# Altium PCB Car_2.0.PcbDoc
Units mm, origin at the board's own origin, x right, y up, seen from the top; angles counter-clockwise.
Board outline 70 x 82.5 mm, 2 copper layers (Top Layer, Bottom Layer); 38 components, 43 nets, 209 pads, 110 vias.
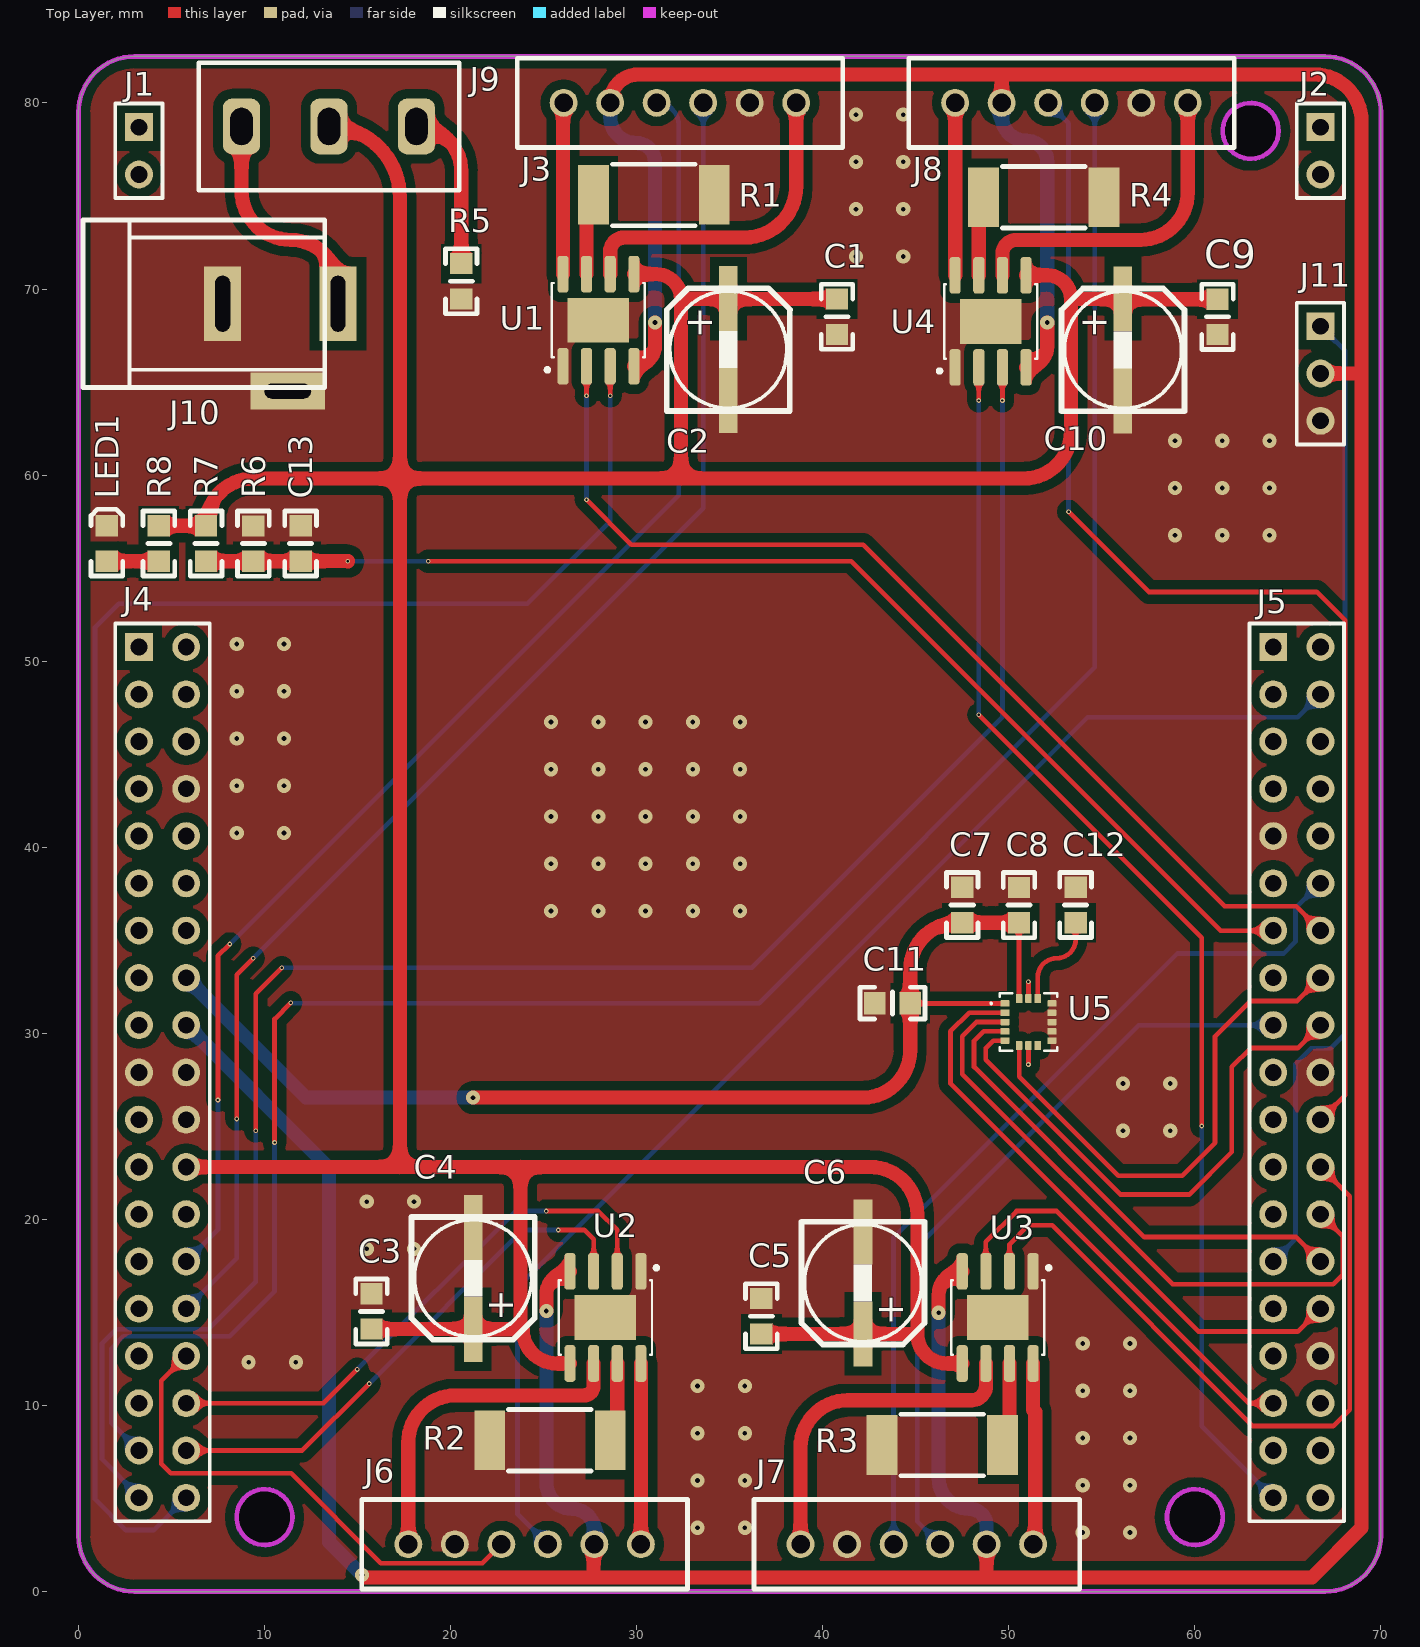
[diagram p0: Top Layer view]
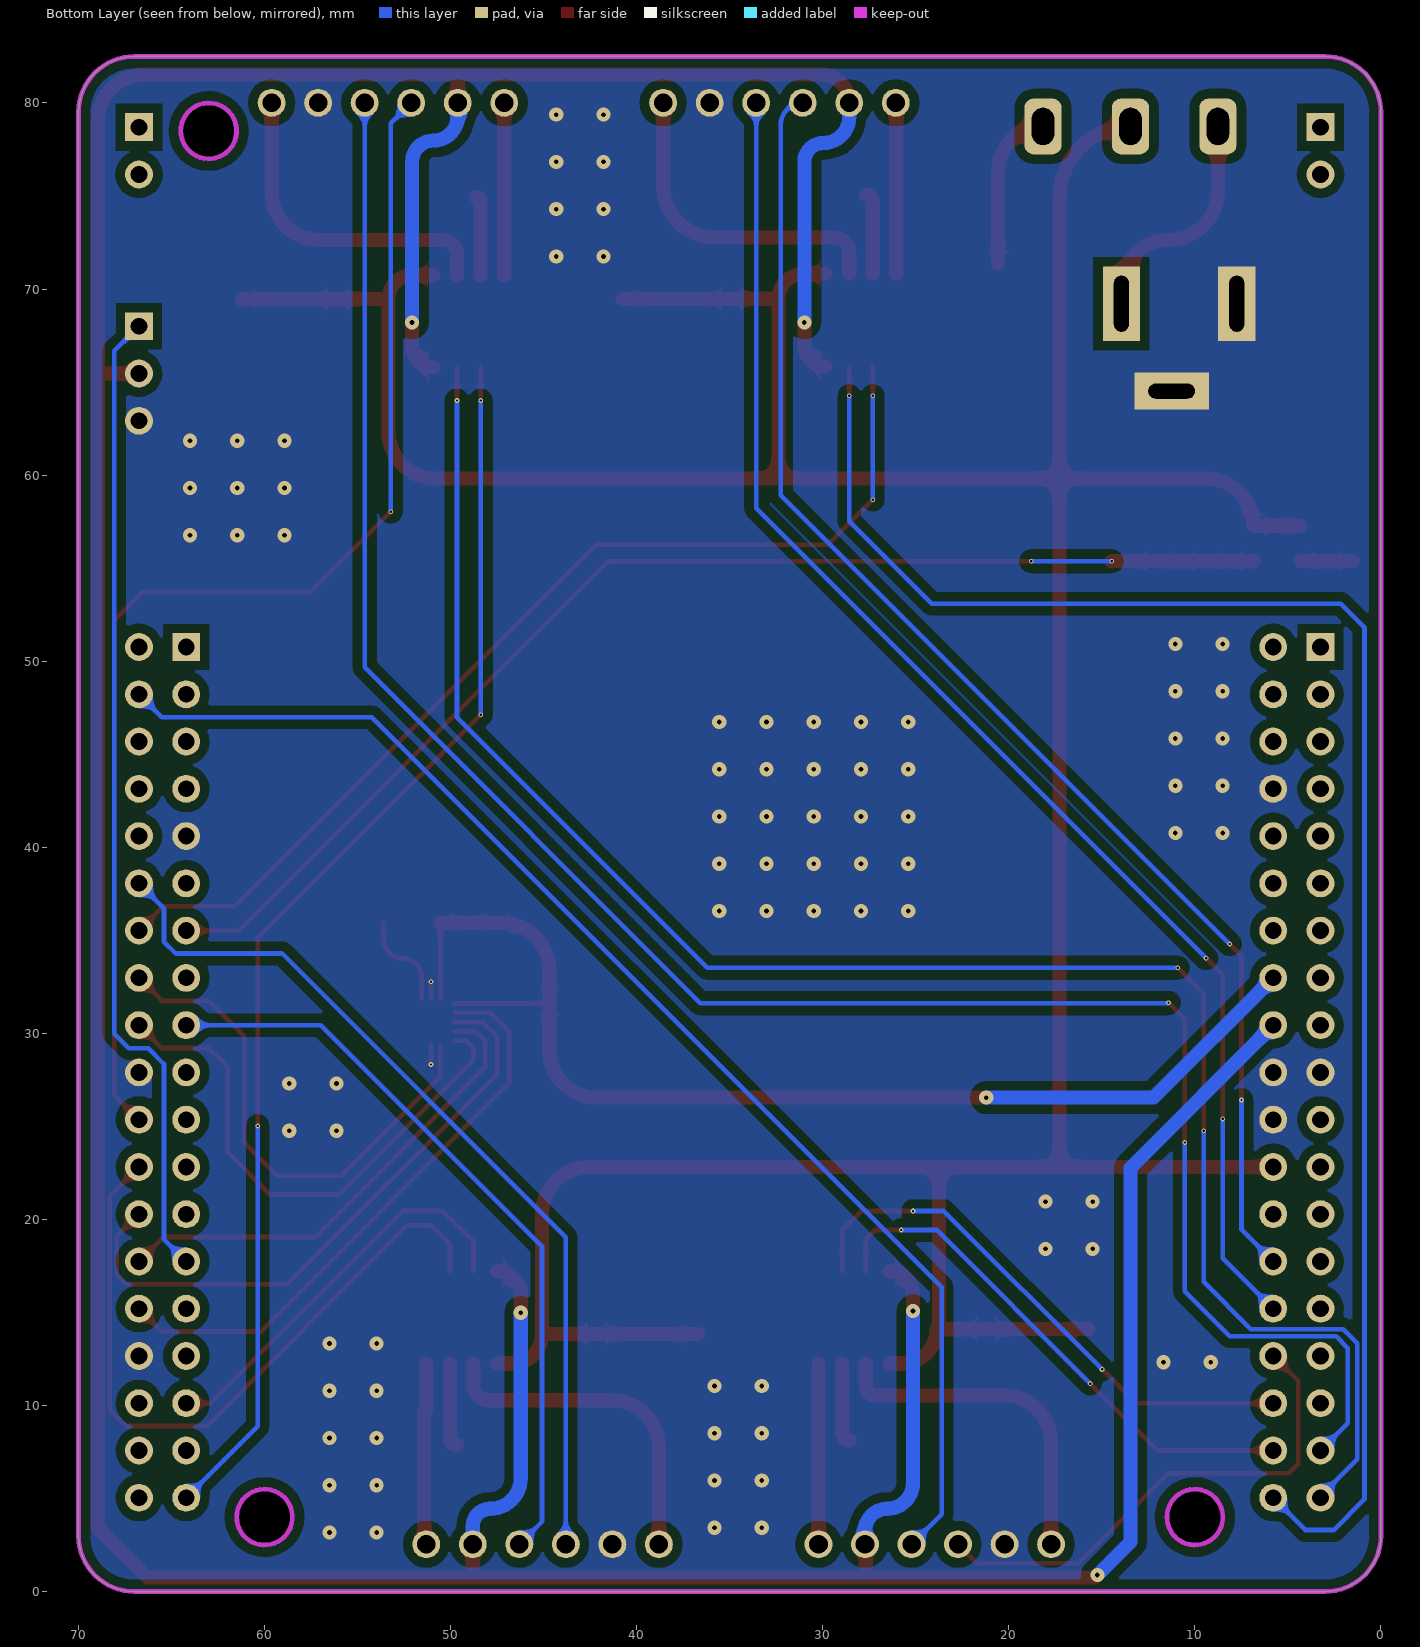
[diagram p1: Bottom Layer view, seen from below]

## Layer stack, top to bottom
Top Solder: solder mask 0.0102, Solder Resist, Dk 3.5
Top Layer: signal copper 0.0356
Dielectric 1: dielectric 0.32, FR-4, Dk 4.8
Bottom Layer: signal copper 0.0356
Bottom Solder: solder mask 0.0102, Solder Resist, Dk 3.5

## Board outline
0,3 0,79.5 cw(c3,79.5) 3,82.5 67,82.5 cw(c67,79.5) 70,79.5 70,3 cw(c67,3) 67,0 3,0 cw(c3,3)
cut-out: 61.5,78.5 ccw(c63,78.5) 63,77 ccw(c63,78.5) 64.5,78.5 ccw(c63,78.5) 63,80 ccw(c63,78.5)
cut-out: 58.5,4 ccw(c60,4) 60,2.5 ccw(c60,4) 61.5,4 ccw(c60,4) 60,5.5 ccw(c60,4)
cut-out: 8.5,4 ccw(c10,4) 10,2.5 ccw(c10,4) 11.5,4 ccw(c10,4) 10,5.5 ccw(c10,4)

## Design rules (kind name [scope] priority, off if disabled: settings)
Clearance [All] p1: gap=0.508 ignorepadtopadclearanceinfootprint=FALSE except(0: Arc-Hole Track-Hole SMDPad-Hole THPad-Hole Via-Hole Fill-Hole Poly-Hole Region-Hole Text-Hole; 0.051: Arc-Arc Arc-Track Arc-SMDPad Arc-THPad Arc-Via Arc-Text Track-Track Track-SMDPad Track-THPad Track-Via Track-Text SMDPad-SMDPad SMDPad-THPad SMDPad-Via SMDPad-Text THPad-THPad THPad-Via THPad-Text Via-Text Text-Text; 0.254: Via-Via)
DiffPairsRouting [All] p1: maxlimit=0.254 minlimit=0.127 mostfreqgap=0.254 toplayer_minwidth=0.254 toplayer_maxwidth=1.016 toplayer_prefwidth=0.508 bottomlayer_minwidth=0.254 bottomlayer_maxwidth=1.016 bottomlayer_prefwidth=0.508 maxuncoupledlength=12.7
HoleToHoleClearance [All] p1: gap=0.076 allowstackedmicrovias=TRUE
MinimumSolderMaskSliver [All] p1: minsoldermaskwidth=0.076
PlaneClearance [All] p1: clearance=0.076
PlaneConnect [All] p1: planeconnectstyle=Direct reliefexpansion=0.508 reliefentries=4 reliefconductorwidth=0.254 reliefairgap=0.254
PolygonConnect [All] p1: connectstyle=Direct reliefconductorwidth=0.254 reliefentries=4 polygonreliefangle="90 Angle" airgapwidth=0.254
RoutingVias [All] p1: holewidth=0.508 width=1.27 viastyle="Through Hole" minholewidth=0.508 minwidth=1.27 maxholewidth=1.016 maxwidth=2.54
SilkToSilkClearance [All] p1: silktosilkclearance=0
SilkToSolderMaskClearance [IsPad] p1: minsilkscreentomaskgap=0 clearancetoexposedcopper=TRUE
SolderMaskExpansion [All] p1: expansion=0.102 istentingtop=FALSE
Width [All] p1: maxlimit=1.016 minlimit=0.127 preferedwidth=0.254 minimp=50.000000 maximp=50.000000 favimp=50.000000
23 further rules are at their usual default settings.

## Components (designator, comment, footprint, x,y, rotation, side; value= is the part's Value field where it differs from the comment)
C1 "0.22u" C_0805 40.767,67.564 r90 top
C2 "C-100uF" SMD-EC-F6.3 34.925,69.483 r270 top
C3 "0.22u" C_0805 15.748,16.002 r270 top
C4 "C-100uF" SMD-EC-F6.3 21.209,14.097 r90 top
C5 "0.22u" C_0805 36.703,15.743 r270 top
C6 "C-100uF" SMD-EC-F6.3 42.164,13.843 r90 top
C7 "0.1u" C_0805 47.498,37.846 r270 top
C8 "2.2u" C_0805 50.546,37.841 r270 top
C9 "0.22u" C_0805 61.214,67.555 r90 top
C10 "C-100uF" SMD-EC-F6.3 56.134,69.469 r270 top
C11 "10n" C_0805 42.799,31.623 r0 top
C12 "0.1u" C_0805 53.594,37.846 r270 top
C13 "200n" C_0805 11.938,57.277 r270 top
J1 "kong-2" HDR1X2 3.25,78.7 r270 top
J2 "kong-2" HDR1X2 66.75,78.7 r270 top
J3 "motor" XH2.54-6P 38.575,80.01 r180 top
J4 "STM32F474_1" HDR2*19 3.25,50.76 r0 top
J5 "STM32F474_2" HDR2*19 64.21,50.76 r0 top
J6 "motor" XH2.54-6P 17.726,2.54 r0 top
J7 "motor" XH2.54-6P 38.808,2.54 r0 top
J8 "motor" XH2.54-6P 59.617,80.01 r180 top
J9 "KEY" SS-12D10 13.462,78.74 r0 top
J10 "DC005" DC-005 7.747,69.215 r180 top
J11 "H1*3" HDR1X3 66.75,68 r270 top
LED1 "LED_0805" LED0805 1.524,55.377 r90 top
R1 "0.25" R_2512 34.163,75.057 r180 top
R2 "0.25" R_2512 22.098,8.128 r0 top
R3 "0.25" R_2512 43.18,7.874 r0 top
R4 "0.25" R_2512 55.121,74.93 r180 top
R5 "100" R_0805 20.574,69.469 r90 top
R6 "10k" R_0805 9.398,57.272 r270 top
R7 "100k" R_0805 6.858,55.377 r90 top
R8 "10k" R_0805 4.318,55.377 r90 top
U1 "A4950ELJTR-T" SOIC-9N 27.943,68.326 r90 top
U2 "A4950ELJTR-T" SOIC-9N 28.321,14.732 r270 top
U3 "A4950ELJTR-T" SOIC-9N 49.403,14.732 r270 top
U4 "A4950ELJTR-T" SOIC-9N 49.022,68.264 r90 top
U5 "ICM-20602" PQFN-16N 51.054,30.607 r0 top

## Footprints (in the part's own frame and the unit in brackets; to place one, negate y for a bottom-side part, rotate by r counter-clockwise, add the part's x,y. Pads: shape width x height; smd on the part's side, far side on the other; paste and mask are expansions set on the pad)
C_0805 [mm]
  rect 1.14x1.2 smd: 1(0,0) 2(1.9,0)
  silkscreen extent -0.8,-0.85 2.7,0.85
DC-005 [mm] "5.5*2.1mm，DC30V,2.5A"
  rect 2x4 hole 0.8 slot 3 at 90 deg: 1(-6.2,0) 2(0,0)
  rect 4x2 hole 0.8 slot 2.5 at 0 deg: 3(-3.5,4.7)
  silkscreen extent -5.48,-4.5 7.5,4.5, body extent -6.55,-4.5 7.5,4.8, height 11.2
HDR1X2 [mm] "Connector; Header; 2 Position"
  rect 1.5x1.5 hole 0.9: 1(0,0)
  round 1.5 hole 0.9: 2(2.54,0)
  silkscreen extent -1.27,-1.27 3.81,1.27
HDR1X3 [mm] "Connector; Header; 3 Position"
  rect 1.5x1.5 hole 0.9: 1(0,0)
  round 1.5 hole 0.9: 2(2.54,0) 3(5.08,0)
  silkscreen extent -1.27,-1.27 6.35,1.27
HDR2*19 [mm]
  rect 1.5x1.5 hole 0.9: 1(0,0)
  round 1.5 hole 0.9: 2(2.54,0) 3(0,-2.54) 4(2.54,-2.54) 5(0,-5.08) 6(2.54,-5.08) 7(0,-7.62) 8(2.54,-7.62) 9(0,-10.16) 10(2.54,-10.16) 11(0,-12.7) 12(2.54,-12.7) 13(0,-15.24) 14(2.54,-15.24) 15(0,-17.78) 16(2.54,-17.78) 17(0,-20.32) 18(2.54,-20.32) 19(0,-22.86) 20(2.54,-22.86) 21(0,-25.4) 22(2.54,-25.4) 23(0,-27.94) 24(2.54,-27.94) 25(0,-30.48) 26(2.54,-30.48) 27(0,-33.02) 28(2.54,-33.02) 29(0,-35.56) 30(2.54,-35.56) 31(0,-38.1) 32(2.54,-38.1) 33(0,-40.64) 34(2.54,-40.64) 35(0,-43.18) 36(2.54,-43.18) 37(0,-45.72) 38(2.54,-45.72)
  silkscreen extent -1.27,-46.99 3.81,1.27
LED0805 [mm]
  rect 1.14x1.2 smd: 1(0,0) 2(1.9,0)
  silkscreen extent -0.8,-0.85 2.79,0.85
PQFN-16N [mm]
  rrect25% 0.49x0.35 smd: 1(-1.26,1) 2(-1.26,0.5) 3(-1.26,0) 4(-1.26,-0.5) 5(-1.26,-1) 9(1.26,-1) 10(1.26,-0.5) 11(1.26,0) 12(1.26,0.5) 13(1.26,1)
  rrect25% 0.35x0.49 smd: 6(-0.5,-1.26) 7(0,-1.26) 8(0.5,-1.26) 14(0.5,1.26) 15(0,1.26) 16(-0.5,1.26)
  silkscreen extent -2.05,-1.55 1.55,1.55, body extent -1.5,-1.5 1.5,1.5, height 0.78
R_0805 [mm]
  rect 1.14x1.2 smd: 1(0,0) 2(1.9,0)
  silkscreen extent -0.8,-0.85 2.7,0.85
R_2512 [mm]
  rect 1.65x3.2 smd paste+0: 1(0,0) 2(6.48,0)
  silkscreen extent 1.02,-1.65 5.46,1.65
SMD-EC-F6.3 [mm]
  rect 3.5x1 smd: 1(0,0) 2(5.475,0)
  silkscreen extent -0.56,-3.31 6.04,3.31, body extent -0.92,-3.32 6.37,3.27, height 6
SOIC-9N [mm]
  rrect54% 1.97x0.6 smd: 1(-2.475,1.905) 2(-2.475,0.635) 3(-2.475,-0.635) 4(-2.475,-1.905) 5(2.475,-1.905) 6(2.475,-0.635) 7(2.475,0.635) 8(2.475,1.905)
  rect 2.41x3.3 smd paste-3: 9(0,0)
  silkscreen extent -2.77,-2.5 2,2.84
SS-12D10 [mm] "脚距3mm"
  rrect50% 2x3 hole 2 slot 1.2 at 0 deg: 1(-4.7,0) 2(0,0) 3(4.7,0)
  silkscreen extent -7,-3.43 7,3.43, body extent -7,-3.1 7,3.1, height 9.65
XH2.54-6P [mm]
  round 1.5 hole 1: 1(0,0) 2(2.5,0) 3(5,0) 4(7.5,0) 5(10,0) 6(12.5,0)
  silkscreen extent -2.5,-2.4 15,2.4

## Part data
C1 C3 C5 C7 C8 C9 C11 C12 C13: library part C_0805
R1 R2 R3 R4: library part R-2512
R5 R6 R7 R8: library part R_0805
U1 U2 U3 U4: Package="SOIC-8 RS Components", Digi-Key_Part_Number=620-1400-1-ND, Digi-Key_Purchase_URL=https://www.digikey.com/product-detail/en/allegro-microsystems/A4950ELJTR-T/620-1400-1-ND/2626340?utm_source=snapeda&utm_medium=aggregator&utm_campaign=symbol, MF="RS Components", MP=A4950ELJTR-T, SnapEDA_Link=https://www.snapeda.com/parts/A4950ELJTR-T/RS%20Components/view-part/943919/?ref=snap
U5: "Accelerometer, Gyroscope, Temperature, 6 Axis Sensor IÂ²C, SPI Output", Package="PQFN-16 TDK-InvenSense", Availability=Good, Check_prices=https://www.snapeda.com/parts/ICM-20602/TDK%20InvenSense/view-part/474472/?ref=eda, MF="TDK InvenSense", MP=ICM-20602, Price=None, Purchase-URL=https://pricing.snapeda.com/search/part/ICM-20602/?ref=eda, SnapEDA_Link=https://www.snapeda.com/parts/ICM-20602/TDK%20InvenSense/view-part/474472/?ref=snap

## Via types
v1: diameter 0.762, hole 0.254, Top Layer to Bottom Layer, 86 vias
v2: diameter 0.254, hole 0.127, Top Layer to Bottom Layer, 24 vias

## Nets (pads, with @x,y where several pads share a name; then routed paths per layer and width w, separated by ;. In a path a pad name is that pad's centre, name@x,y a point inside that pad or via, vN(x,y) a via of type N, cw(c..) or ccw(c..) an arc to the next point about the centre after c; other vN are vias at no path point)
3.3V: C7.2 C8.2 C11.2 J4.16 U5.1 U5.16 | length 63.8
  Top Layer w0.254: C11.2@44.699,31.607 U5.1 ; C8.2 50.546,31.867 U5.16
  Top Layer w0.762: v1(21.209,26.543) 42.159,26.543 ccw(c42.159,29.083) 44.699,29.083 44.699,31.607 C11.2 44.699,33.406 cw(c47.239,33.406) 47.239,35.946 C7.2 47.498,35.941 C8.2
  Bottom Layer w0.762: J4.16 12.227,26.543 v1(21.209,26.543)
5V: J3.5 J4.18 J6.5 J7.5 J8.5 J11.2 U1.4 U2.4 U3.4 U4.4 | length 280
  Top Layer w0.762: v1(15.24,0.889) 15.367,0.762 48.808,0.762 ; v1(25.146,15.073) 25.146,15.937 cw(c26.416,15.937) U2.4 ; 27.686,0.929 27.686,2.5 J6.5 ; J3.5 cw(c30.099,80.01) 30.099,81.534 49.617,81.534 49.669,81.534 ; U1.4 ccw(c29.848,66.991) 30.988,66.991 v1(30.988,68.199) ; v1(46.228,14.986) 46.228,15.937 cw(c47.498,15.937) U3.4 ; J7.5 48.808,0.762 ; J8.5 49.617,81.482 cw(c49.669,81.482) 49.669,81.534 ; U4.4 ccw(c50.927,66.932) 52.07,66.932 v1(52.07,68.199) ; J11.2 68.906,65.46 cw(c68.906,65.405) 68.961,65.405 ; 48.808,0.762 66.294,0.762 68.961,3.429 68.961,61.595 68.961,65.405 ; 49.669,81.534 66.421,81.534 cw(c66.421,78.994) 68.961,78.994 68.961,65.46 68.961,65.405
  Bottom Layer w0.762: J4.18 13.462,22.768 13.462,2.667 v1(15.24,0.889) ; v1(25.146,15.073) 25.146,5.842 ccw(c26.543,5.842) 26.543,4.445 cw(c26.543,3.262) 27.726,3.262 J6.5 ; J3.5 28.575,79.248 ccw(c29.972,79.248) 29.972,77.851 cw(c29.972,76.835) 30.988,76.835 v1(30.988,68.199) ; v1(46.228,14.986) 46.228,6.096 ccw(c47.879,6.096) 47.879,4.445 cw(c47.879,3.516) 48.808,3.516 J7.5 ; J8.5 49.617,79.288 ccw(c50.927,79.288) 50.927,77.978 cw(c50.927,76.835) 52.07,76.835 v1(52.07,68.199)
12V: C1.2 C2.1 C3.2 C4.1 C5.2 C6.1 C9.2 C10.1 J4.24 J9.2 R7.2 R8.2 U1.5 U2.5 U3.5 U4.5 | length 228.9
  Top Layer w0.762: R8.2 R7.2 cw(c9.398,57.277) 9.398,59.817 17.272,59.817 ; J4.24 17.272,22.82 ; J9.2 cw(c13.462,74.93) 17.272,74.93 17.272,59.817 ; C3.2 21.209,14.102 C4.1 23.876,14.097 ; U2.5 25.716,12.257 cw(c25.716,14.097) 23.876,14.097 ; U1.5 31.053,70.801 cw(c31.053,69.469) 32.385,69.483 ; C5.2 C6.1 45.085,13.843 ; C1.2 34.944,69.464 cw(c34.944,69.483) C2.1 32.385,69.483 ; U3.5 46.671,12.257 cw(c46.671,13.843) 45.085,13.843 ; U4.5 52.07,70.739 cw(c52.07,69.469) 53.34,69.469 ; C9.2 56.134,69.455 C10.1 53.34,69.469 ; 17.272,22.82 17.272,59.817 ; 17.272,22.82 23.749,22.82 ; 17.272,59.817 32.385,59.817 ; 23.749,22.82 42.545,22.82 cw(c42.545,20.28) 45.085,20.28 45.085,13.843 ; 23.749,22.82 23.749,14.224 ccw(c23.876,14.224) 23.876,14.097 ; 32.385,59.817 50.8,59.817 ccw(c50.8,62.357) 53.34,62.357 53.34,69.469 ; 32.385,59.817 32.385,69.483
ADC_IN3: C13.2 J5.13 R6.2 R7.1 | length 65.6
  Top Layer w0.254: v2(18.796,55.372) 41.529,55.372 61.381,35.52 J5.13
  Top Layer w0.762: R7.1 6.861,55.374 9.396,55.374 R6.2 9.4,55.374 11.935,55.374 C13.2 v2(14.473,55.377) v2@14.478,55.372
  Bottom Layer w0.254: v2(14.473,55.377) 14.478,55.372 v2(18.796,55.372)
CS: J5.18 U5.5 | length 29.3
  Top Layer w0.254: U5.5 49.165,29.607 48.768,29.21 48.768,28.575 56.007,21.336 59.69,21.336 61.976,23.622 61.976,28.194 62.992,29.21 65.52,29.21 J5.18
GND: C1.1 C2.2 C3.1 C4.2 C5.1 C6.2 C7.1 C8.1 C9.1 C10.2 C11.1 C12.1 C13.1 J3.2 J4.8 J4.19 J4.20 J4.22 J5.9 J5.20 J5.32 J6.2 J7.2 J8.2 J10.2 J10.3 J11.3 LED1.2 R1.1 R2.1 R3.1 R4.1 R5.1 R6.1 U1.1 U1.9 U2.1 U2.9 U3.1 U3.9 U4.1 U4.9 U5.7 U5.9 U5.10 U5.11 U5.12 U5.13 U5.15 | length 1.9
  Top Layer w0.254: v2(51.054,28.321) U5.7 ; U5.15 v2(51.054,32.766)
  other v1: 53.975,3.175 56.515,3.175 33.274,3.429 35.814,3.429 53.975,5.715 56.515,5.715 33.274,5.969 35.814,5.969 53.975,8.255 56.515,8.255 33.274,8.509 35.814,8.509 53.975,10.795 56.515,10.795 33.274,11.049 35.814,11.049 9.144,12.319 11.684,12.319 53.975,13.335 56.515,13.335 15.494,18.415 18.034,18.415 15.494,20.955 18.034,20.955 56.134,24.765 58.674,24.765 56.134,27.305 58.674,27.305 25.4,36.576 27.94,36.576 30.48,36.576 33.02,36.576 35.56,36.576 25.4,39.116 27.94,39.116 30.48,39.116 33.02,39.116 35.56,39.116 8.509,40.767 11.049,40.767 25.4,41.656 27.94,41.656 30.48,41.656 33.02,41.656 35.56,41.656 8.509,43.307 11.049,43.307 25.4,44.196 27.94,44.196 30.48,44.196 33.02,44.196 35.56,44.196 8.509,45.847 11.049,45.847 25.4,46.736 27.94,46.736 30.48,46.736 33.02,46.736 35.56,46.736 8.509,48.387 11.049,48.387 8.509,50.927 11.049,50.927 58.928,56.769 61.468,56.769 64.008,56.769 58.928,59.309 61.468,59.309 64.008,59.309 58.928,61.849 61.468,61.849 64.008,61.849 41.783,71.755 44.323,71.755 41.783,74.295 44.323,74.295 41.783,76.835 44.323,76.835 41.783,79.375 44.323,79.375
INT: J5.16 U5.6 | length 27.8
  Top Layer w0.254: U5.6 50.554,27.678 55.88,22.352 59.309,22.352 61.087,24.13 61.087,29.834 62.992,31.739 65.509,31.739 J5.16
MISO: J5.28 U5.4 | length 26.2
  Top Layer w0.254: U5.4 48.649,30.107 48.133,29.591 48.133,28.194 57.277,19.05 65.44,19.05 J5.28
MOSI: J5.26 U5.3 | length 33.7
  Top Layer w0.254: U5.3 48.26,30.607 47.498,29.845 47.498,27.813 58.801,16.51 67.437,16.51 67.945,17.018 67.945,19.085 J5.26
NetC12_2: C12.2 U5.14 | length 5.2
  Top Layer w0.254: U5.14 51.554,33.012 cw(c52.578,33.012) 52.578,34.036 ccw(c52.578,35.052) 53.594,35.052 C12.2
NetJ9_3: J9.3 R5.2 | length 8.7
  Top Layer w0.762: J9.3 cw(c18.162,76.328) 20.574,76.328 R5.2
NetLED1_1: LED1.1 R8.1 | length 2.8
  Top Layer w0.762: LED1.1 R8.1
NetR1_2: R1.2 U1.7 | length 4.5
  Top Layer w0.762: U1.7 27.308,74.682 cw(c27.683,74.682) R1.2
NetR2_2: R2.2 U2.7 | length 4.3
  Top Layer w0.762: R2.2 ccw(c28.578,8.506) 28.956,8.506 U2.7
NetR3_2: R3.2 U3.7 | length 4.6
  Top Layer w0.762: R3.2 ccw(c49.66,8.252) 50.038,8.252 U3.7
NetR4_2: R4.2 U4.7 | length 4.3
  Top Layer w0.762: U4.7 48.387,74.676 cw(c48.641,74.676) R4.2
OUT1_1: J3.1 U1.6 | length 17.7
  Top Layer w0.762: U1.6 28.578,72.009 28.575,72.009 cw(c29.337,72.009) 29.337,72.771 35.814,72.771 ccw(c35.814,75.532) 38.575,75.532 J3.1
OUT1_2: J3.6 U1.8 | length 9.2
  Top Layer w0.762: U1.8 26.048,70.811 26.048,79.983 J3.6
OUT2_1: J6.1 U2.6 | length 18.4
  Top Layer w0.762: J6.1 17.726,8.001 cw(c20.266,8.001) 20.266,10.541 27.178,10.541 ccw(c27.178,11.049) 27.686,11.049 U2.6
OUT2_2: J6.6 U2.8 | length 9.7
  Top Layer w0.762: J6.6 U2.8
OUT3_1: J7.1 U3.6 | length 18.5
  Top Layer w0.762: J7.1@38.949,2.681 J7.1 38.808,7.738 cw(c41.348,7.738) 41.348,10.278 47.997,10.278 ccw(c47.997,11.049) 48.768,11.049 U3.6
OUT3_2: J7.6 U3.8 | length 9.8
  Top Layer w0.762: J7.6 51.422,2.654 51.422,9.653 51.308,9.767 U3.8
OUT4_1: J8.1 U4.6 | length 17.8
  Top Layer w0.762: U4.6 49.657,71.882 cw(c50.419,71.882) 50.419,72.644 57.077,72.644 ccw(c57.077,75.184) 59.617,75.184 J8.1
OUT4_2: J8.6 U4.8 | length 9.3
  Top Layer w0.762: U4.8 J8.6
POWER: J9.1 J10.1 | length 12.5
  Top Layer w0.762: J9.1 8.762,75.289 ccw(c11.407,75.289) 11.407,72.644 cw(c11.407,70.104) 13.947,70.104 J10.1
SCK: J5.30 U5.2 | length 32.1
  Top Layer w0.254: U5.2 47.871,31.107 46.863,30.099 46.863,27.305 60.198,13.97 65.52,13.97 J5.30
TIM1_CH1: J4.38 U1.3 | length 91.9
  Top Layer w0.254: 28.578,64.605 v2(28.575,64.262) U1.3
  Bottom Layer w0.254: J4.38 4.052,3.302 2.54,3.302 0.889,4.953 0.889,51.816 2.159,53.086 24.13,53.086 28.575,57.531 v2(28.575,64.262)
TIM1_CH1N: J5.14 U1.2 | length 56.2
  Top Layer w0.254: v2(27.305,58.674) 29.718,56.261 42.164,56.261 61.595,36.83 65.44,36.83 J5.14 ; v2(27.305,64.262) 27.308,64.265 U1.2
  Bottom Layer w0.254: v2(27.305,58.674) v2(27.305,64.262)
TIM1_CH2: J4.36 U2.3 | length 28.7
  Top Layer w0.254: J4.36 12.025,7.58 v2(15.621,11.176) ; v2(25.781,19.431) 27.178,19.431 27.686,18.923 U2.3
  Bottom Layer w0.254: v2(15.621,11.176) 23.876,19.431 v2(25.781,19.431)
TIM1_CH2N: J4.34 U2.2 | length 30.1
  Top Layer w0.254: J4.34 13.168,10.12 v2(14.986,11.938) ; v2(25.146,20.447) 27.94,20.447 28.956,19.431 U2.2
  Bottom Layer w0.254: v2(14.986,11.938) 23.495,20.447 v2(25.146,20.447)
TIM1_CH3: J5.33 U3.3 | length 22
  Top Layer w0.254: U3.3 48.768,18.796 50.419,20.447 52.578,20.447 62.905,10.12 J5.33
TIM1_CH3N: J5.24 U3.2 | length 38.7
  Top Layer w0.254: U3.2 50.038,18.669 51.054,19.685 52.324,19.685 63.119,8.89 67.437,8.89 68.326,9.779 68.326,21.244 J5.24
TIM1_CH4: J4.37 U4.3 | length 99.3
  Top Layer w0.254: v2(9.525,24.765) 9.525,32.131 v2(10.922,33.528) ; v2(49.657,64.008) U4.3
  Bottom Layer w0.254: J4.37 3.25,5.123 1.27,7.103 1.27,13.335 2.032,14.097 6.985,14.097 9.525,16.637 v2(9.525,24.765) ; v2(10.922,33.528) 36.195,33.528 49.657,46.99 v2(49.657,64.008)
TIM1_CH4N: J5.37 U4.2 | length 67.3
  Top Layer w0.254: v2(48.387,47.117) 60.371,35.133 v2(60.371,25.019) ; v2(48.387,64.008) U4.2
  Bottom Layer w0.254: v2(48.387,47.117) v2(48.387,64.008) ; v2(60.371,25.019) 60.371,8.879 J5.37
TIM16_CH1: J5.27 J11.1 | length 53
  Bottom Layer w0.254: J5.27 65.405,18.935 65.405,28.352 66.246,29.192 67.292,29.192 68.072,29.972 68.072,66.678 J11.1
TIM_A1: J3.4 J4.28 | length 73.9
  Top Layer w0.254: v2(7.493,26.416) 7.493,34.163 v2(8.128,34.798)
  Bottom Layer w0.254: J4.28 7.493,19.443 v2(7.493,26.416) ; v2(8.128,34.798) 32.258,58.928 32.258,78.827 ccw(c31.075,78.827) J3.4
TIM_A2: J5.4 J6.4 | length 70.8
  Bottom Layer w0.254: J6.4 23.601,4.165 23.601,16.362 54.229,46.99 65.52,46.99 J5.4
TIM_A3: J5.17 J7.4 | length 40.6
  Bottom Layer w0.254: J7.4 45.085,3.763 45.085,18.542 56.983,30.44 J5.17
TIM_A4: J5.22 J8.4 | length 67.1
  Top Layer w0.254: v2(53.213,58.039) 57.531,53.721 66.548,53.721 68.072,52.197 68.072,26.682 J5.22
  Bottom Layer w0.254: J8.4 53.213,78.914 v2(53.213,58.039)
TIM_B1: J3.3 J4.30 | length 76.3
  Top Layer w0.254: v2(8.509,25.4) 8.509,33.147 v2(9.398,34.036)
  Bottom Layer w0.254: J4.30 8.509,17.919 v2(8.509,25.4) ; v2(9.398,34.036) 33.575,58.213 J3.3
TIM_B2: J4.32 J6.3 | length 27.3
  Top Layer w0.254: J4.32 4.445,11.315 4.445,6.858 4.953,6.35 11.43,6.35 16.256,1.524 21.71,1.524 J6.3
TIM_B3: J5.12 J7.3 | length 48.4
  Bottom Layer w0.254: J7.3 43.808,19.043 59.055,34.29 64.77,34.29 65.405,34.925 65.405,36.715 J5.12
TIM_B4: J4.35 J8.3 | length 113
  Top Layer w0.254: v2(10.541,24.13) 10.541,30.766 v2(11.414,31.639)
  Bottom Layer w0.254: J4.35 1.778,9.052 1.778,13.081 2.413,13.716 8.128,13.716 10.541,16.129 v2(10.541,24.13) ; v2(11.414,31.639) 11.43,31.623 36.576,31.623 54.617,49.664 J8.3
pads on no net: J1.1 J1.2 J2.1 J2.2 J4.1 J4.2 J4.3 J4.4 J4.5 J4.6 J4.7 J4.9 J4.10 J4.11 J4.12 J4.13 J4.14 J4.15 J4.17 J4.21 J4.23 J4.25 J4.26 J4.27 J4.29 J4.31 J4.33 J5.1 J5.2 J5.3 J5.5 J5.6 J5.7 J5.8 J5.10 J5.11 J5.15 J5.19 J5.21 J5.23 J5.25 J5.29 J5.31 J5.34 J5.35 J5.36 J5.38 U5.8

## Polygon pours and split planes (outlines as drawn)
GND on Top Layer "GND_L01_P000" (solid, pour order 0): 0,3 0,79.5 cw(c3,79.5) 3,82.5 67,82.5 cw(c67,79.5) 70,79.5 70,3 cw(c67,3) 67,0 3,0 cw(c3,3)
GND on Bottom Layer "GND_L02_P001" (solid, pour order 1): 0,3 0,79.5 cw(c3,79.5) 3,82.5 67,82.5 cw(c67,79.5) 70,79.5 70,3 cw(c67,3) 67,0 3,0 cw(c3,3)

## Keep-outs
Keep-Out Layer:
  circle w0.254: c60,4 r1.5
  circle w0.254: c63,78.5 r1.5
  circle w0.254: c10,4 r1.5
  lines w0.254: 0,3 ccw(c3,3) 3,0 67,0 ccw(c67,3) 70,3 70,79.5 ccw(c67,79.5) 67,82.5 3,82.5 ccw(c3,79.5) 0,79.5 0,3

## Text inside footprints (layer, text, board x,y; h text height)
C2: Top Overlay "+" at 32.761,69.052 h1.5 r270
C4: Top Overlay "+" at 23.373,14.527 h1.5 r90
C6: Top Overlay "+" at 44.328,14.273 h1.5 r90
C10: Top Overlay "+" at 53.97,69.039 h1.5 r270